# Altium PCB PCB2.PcbDoc
Units mm, origin at the board's own origin, x right, y up, seen from the top; angles counter-clockwise.
Board outline 170.05 x 133.6 mm, 2 copper layers (Top Layer, Bottom Layer); 22 components, 20 nets, 102 pads, 5 vias.
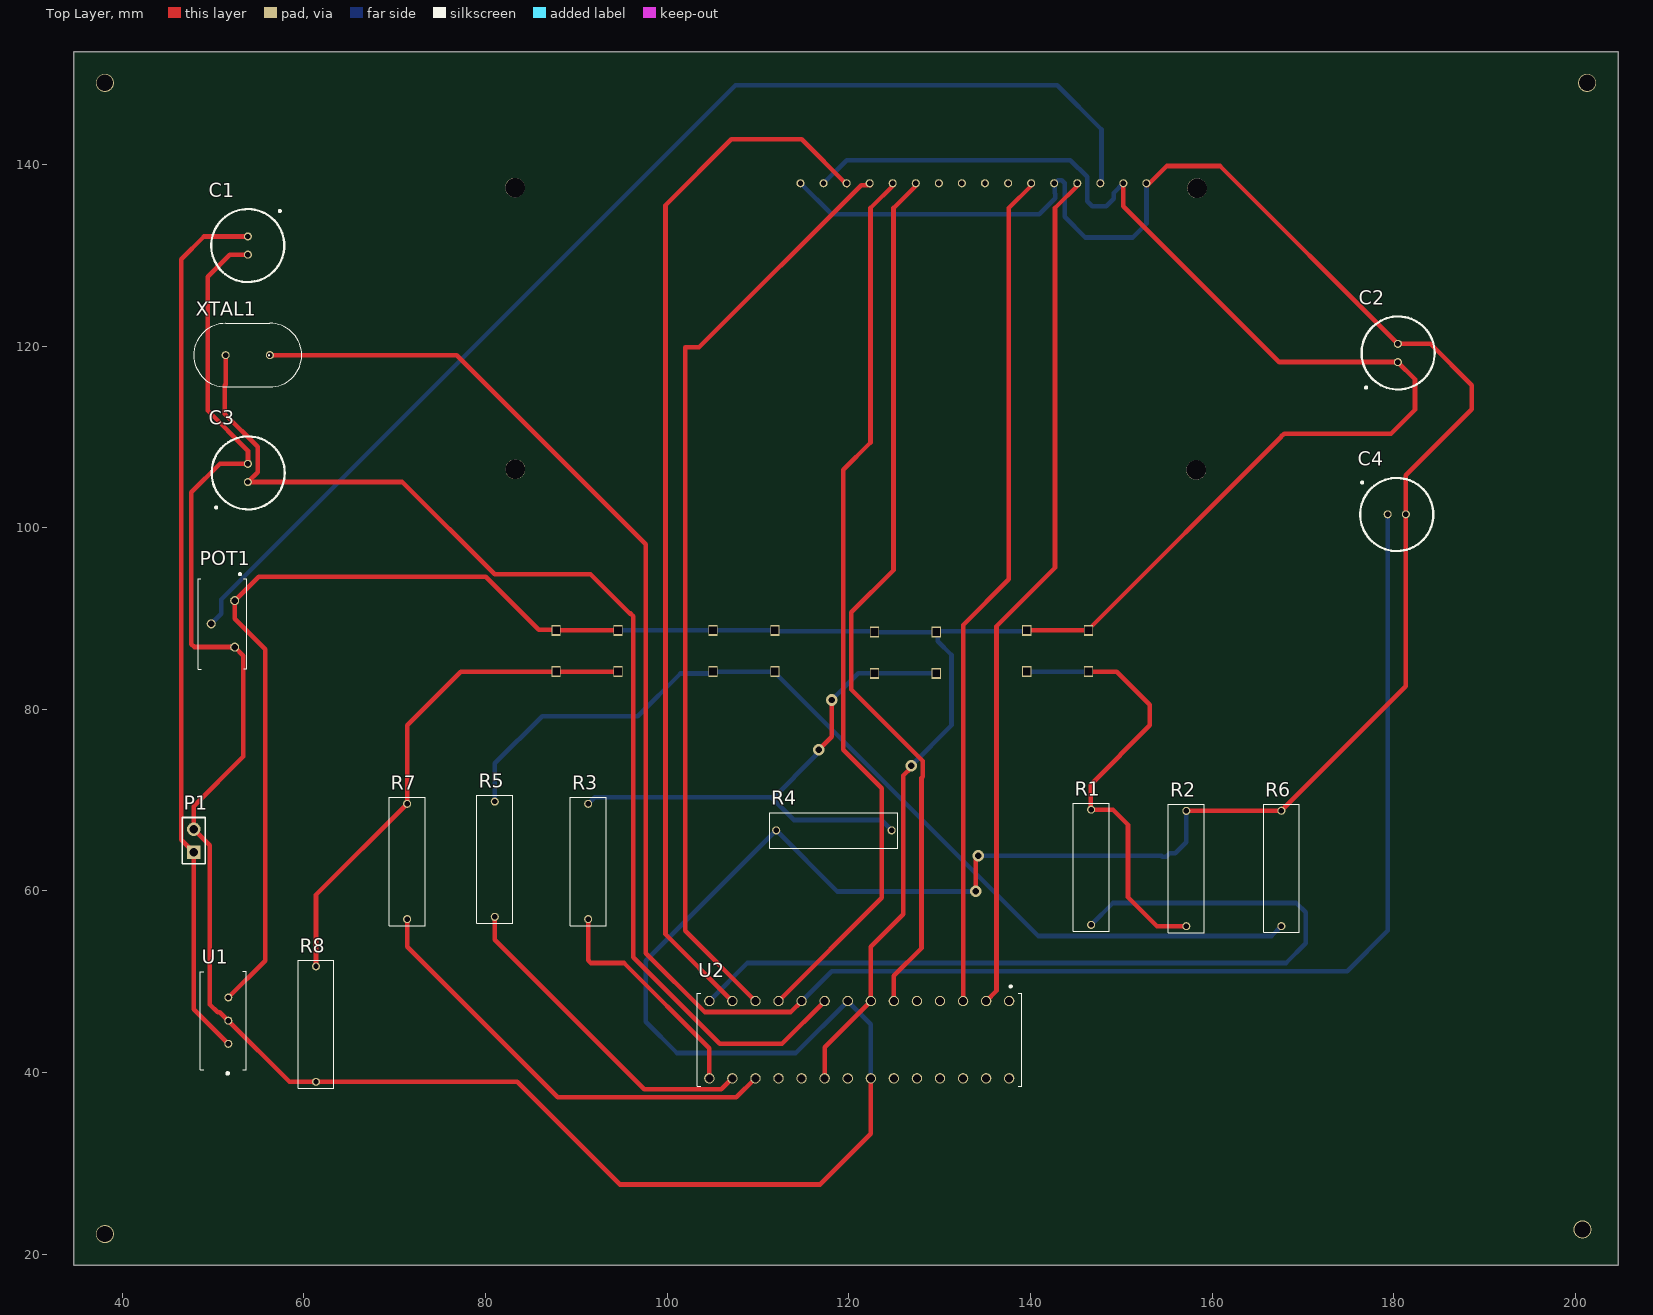
[diagram p0: Top Layer view]
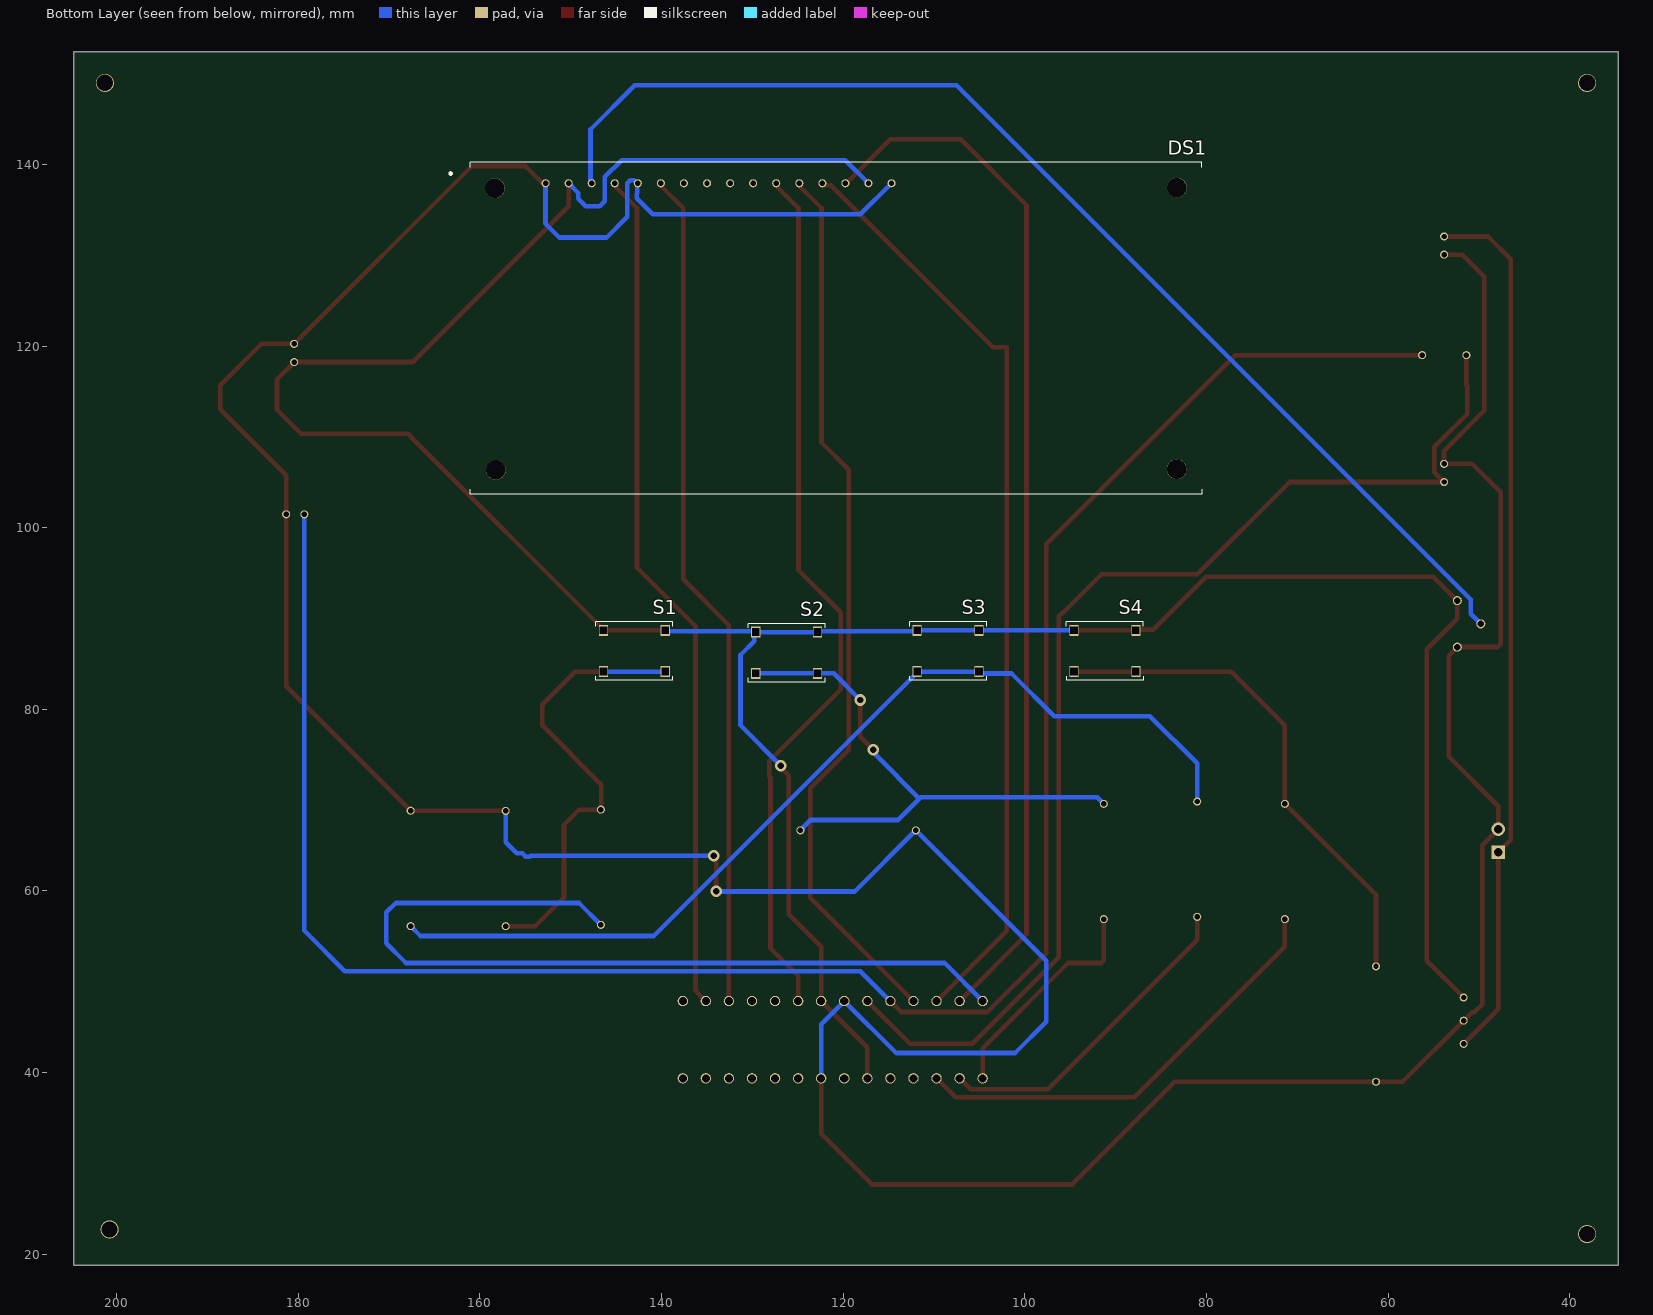
[diagram p1: Bottom Layer view, seen from below]
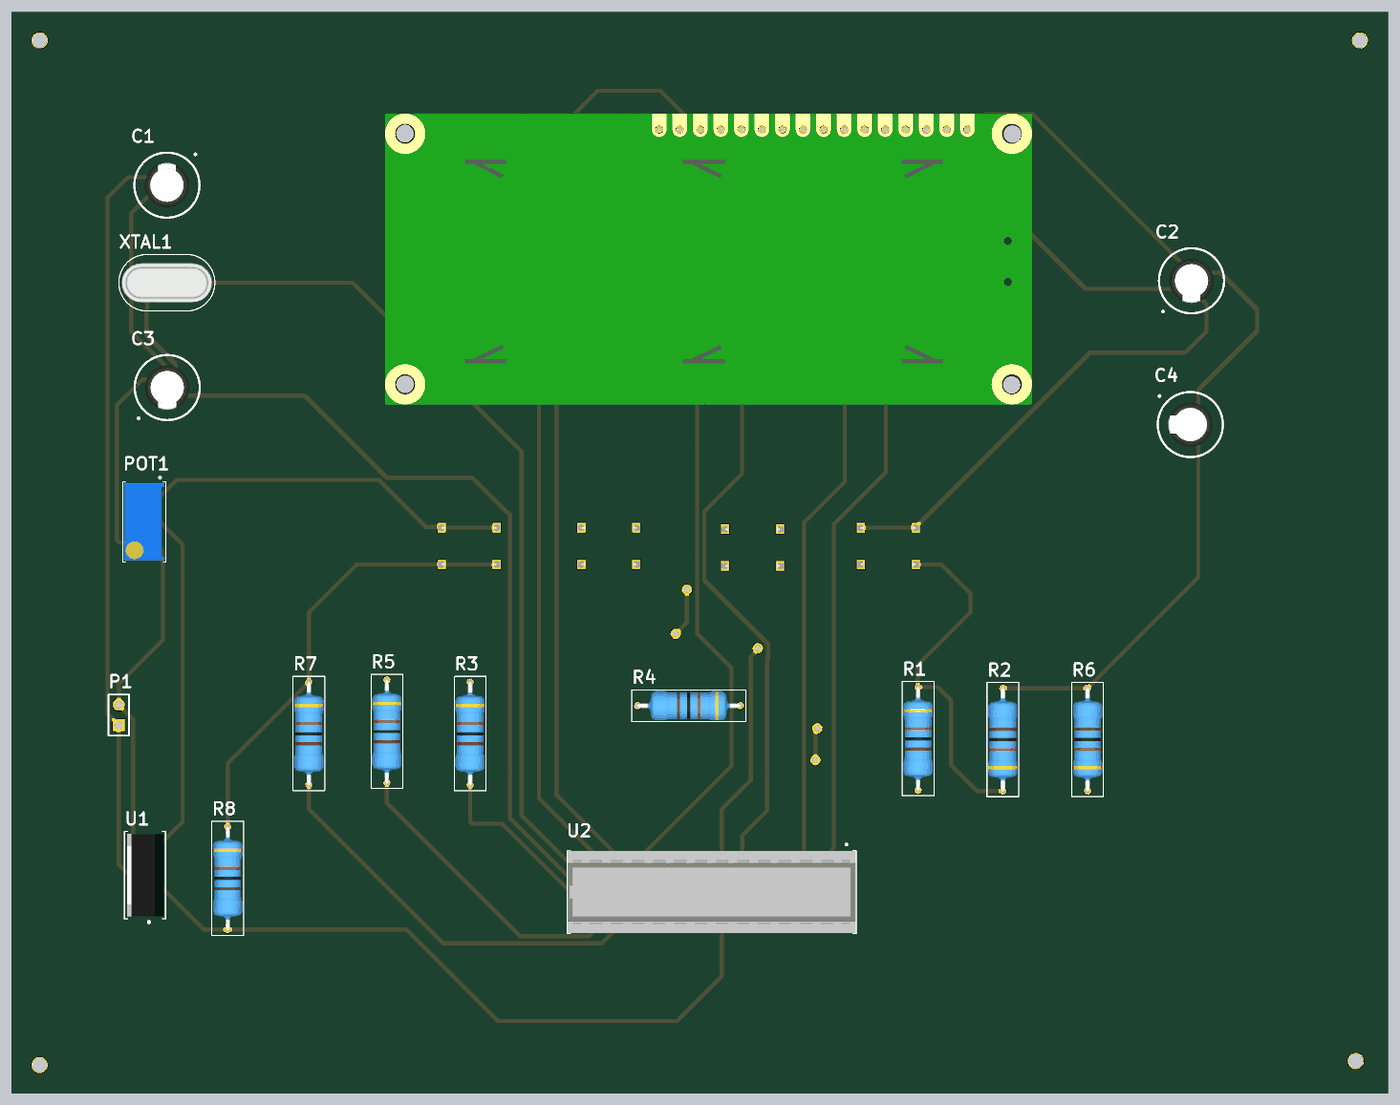
[diagram p2: 3D render of the assembled board from above, using the file's embedded part models]
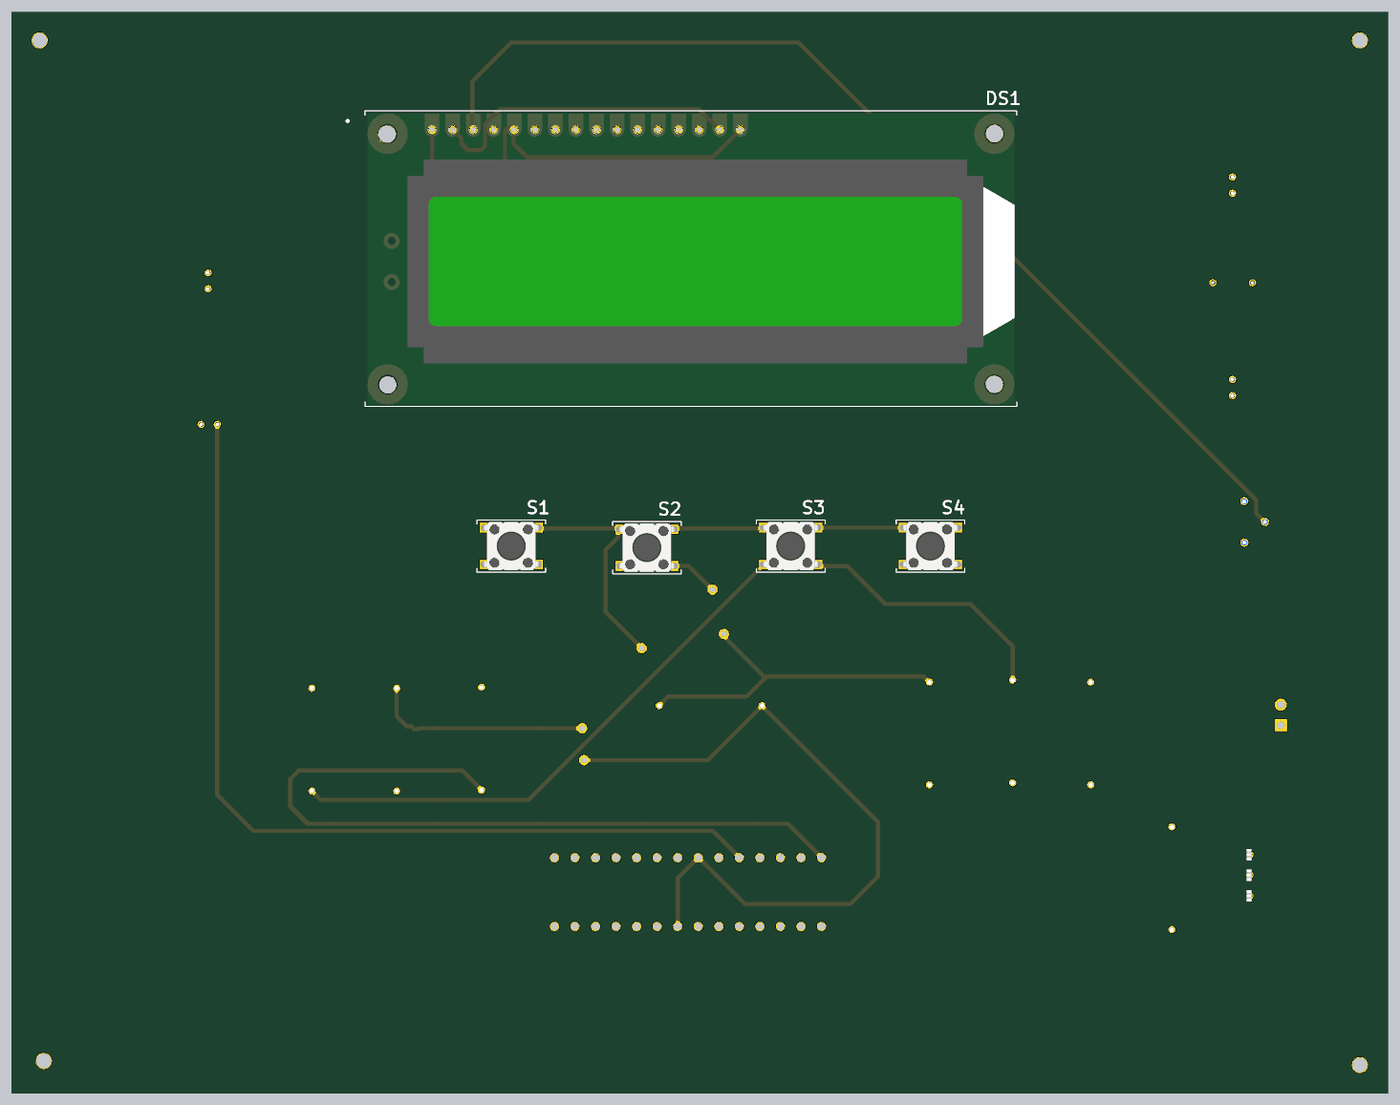
[diagram p3: 3D render of the assembled board from below, using the file's embedded part models]

## Layer stack, top to bottom
Top Solder: solder mask 0.0102, Solder Resist, Dk 3.5
Top Layer: signal copper 0.0356
Dielectric 1: dielectric 0.32, FR-4, Dk 4.8
Bottom Layer: signal copper 0.0356
Bottom Solder: solder mask 0.0102, Solder Resist, Dk 3.5

## Board outline
34.671,18.796 204.724,18.796 204.724,152.4 34.671,152.4

## Design rules (kind name [scope] priority, off if disabled: settings)
Clearance [All] p1: gap=0.381 ignorepadtopadclearanceinfootprint=TRUE
PolygonConnect [All] p1: connectstyle=Relief reliefconductorwidth=0.254 reliefentries=4 polygonreliefangle="90 Angle" airgapwidth=0.254
RoutingVias [All] p1: holewidth=0.711 width=1.27 viastyle="Through Hole" minholewidth=0.711 minwidth=1.27 maxholewidth=0.711 maxwidth=1.27
SilkToSolderMaskClearance [IsPad] p1: minsilkscreentomaskgap=0.051 clearancetoexposedcopper=TRUE
SolderMaskExpansion [All] p1: expansion=0.102 istentingtop=FALSE
Width [All] p1: maxlimit=0.635 minlimit=0.381 preferedwidth=0.508
29 further rules are at their usual default settings.

## Components (designator, comment, footprint, x,y, rotation, side; value= is the part's Value field where it differs from the comment)
C1 "Capacitor" UMP1HR22MDD1TP 53.848,131.064 r270 top locked value=0.22uF
C2 "Capacitor" UMP1HR22MDD1TP 180.467,119.237 r90 top locked value=0.22uF
C3 "Capacitor" UMP1HR22MDD1TP 53.848,106.029 r90 top locked value=0.22uF
C4 "Capacitor" UMP1HR22MDD1TP 180.34,101.473 r0 top locked value=0.22uF
DS1 "LM016L" "LCD DISPLAY" 123.352,123.249 r180 bottom locked
P1 "Header 2" HDR1X2 47.879,64.262 r90 top locked
POT1 "Variable Resistor" "10k Trimmer" 51.054,89.408 r270 top locked
R1 "Resistor" RESAD975W59L900D300 146.685,62.611 r270 top locked value=10K
R2 "Resistor" RESAD975W59L900D300 157.168,62.47 r90 top locked value=10K
R3 "Resistor" RESAD975W59L900D300 91.313,63.246 r270 top locked value=10K
R4 "Resistor" RESAD975W59L900D300 118.364,66.675 r180 top locked value=10K
R5 "Resistor" RESAD975W59L900D300 81.026,63.5 r270 top locked value=10K
R6 "Resistor" RESAD975W59L900D300 167.64,62.484 r90 top locked value=10K
R7 "Resistor" RESAD975W59L900D300 71.374,63.246 r270 top locked value=10K
R8 "Resistor" RESAD975W59L900D300 61.341,45.339 r270 top locked value=10K
S1 "Push Button - SPST" "PUSH BUTTON" 143.002,86.424 r180 bottom locked
S2 "Push Button - SPST" "PUSH BUTTON" 126.238,86.233 r180 bottom locked
S3 "Push Button - SPST" "PUSH BUTTON" 108.458,86.424 r180 bottom locked
S4 "Push Button - SPST" "PUSH BUTTON" 91.186,86.424 r180 bottom locked
U1 "7805 Voltage Regulator" TO255P1040X460X1968-3 51.689,45.72 r90 top locked value=5V
U2 "Atmega 328P U" DIP793W45P254L3479H457Q28 121.158,43.624 r270 top locked
XTAL1 "Crystal" ECS-160-20-4VX 53.823,118.996 r0 top locked

## Footprints (in the part's own frame and the unit in brackets; to place one, negate y for a bottom-side part, rotate by r counter-clockwise, add the part's x,y. Pads: shape width x height; smd on the part's side, far side on the other; paste and mask are expansions set on the pad)
"10k Trimmer" [mm]
  round 1 hole 0.7: 1(-2.56,1.33) 2(2.56,1.33) 3(0,-1.25)
  silkscreen extent -5.58,-2.67 4.98,2.66, body extent -4.76,-2.48 4.77,2.48, height 11.55
DIP793W45P254L3479H457Q28 [mil]
  round 45 hole 35: 1(-167.5,650) 2(-167.5,550) 3(-167.5,450) 4(-167.5,350) 5(-167.5,250) 6(-167.5,150) 7(-167.5,50) 8(-167.5,-50) 9(-167.5,-150) 10(-167.5,-250) 11(-167.5,-350) 12(-167.5,-450) 13(-167.5,-550) 14(-167.5,-650) 15(167.5,-650) 16(167.5,-550) 17(167.5,-450) 18(167.5,-350) 19(167.5,-250) 20(167.5,-150) 21(167.5,-50) 22(167.5,50) 23(167.5,150) 24(167.5,250) 25(167.5,350) 26(167.5,450) 27(167.5,550) 28(167.5,650)
  silkscreen extent -235,-703 202,704, body extent -201,-701 201,701, height 314
ECS-160-20-4VX [mil]
  round 35 hole 23.62: 1(-96.06,0) 2(95.97,0.13)
  silkscreen extent -234,-138 234,138, body extent -220,-96 220,95, height 157
HDR1X2 [mm] "Connector; Header; 2 Position"
  rect 1.5x1.5 hole 0.9: 1(0,0)
  round 1.5 hole 0.9: 2(2.54,0)
  silkscreen extent -1.27,-1.27 3.81,1.27
"LCD DISPLAY" [mil]
  round 35 hole 23.62: 1(-1158.62,577.66) 2(-1058.62,577.66) 3(-958.62,577.66) 4(-858.62,577.66) 5(-758.62,577.66) 6(-658.62,577.66) 7(-558.62,577.66) 8(-458.62,577.66) 9(-358.62,577.66) 10(-258.62,577.66) 11(-158.62,577.66) 12(-58.62,577.66) 13(41.38,577.66) 14(141.39,577.66) 15(241.39,577.66) 16(341.13,577.7)
  round 85.35 hole 85.04 unplated: 17(-1374.16,-664.84)
  round 85.35 hole 85.04: 18(1577.45,-662.19) 19(-1378.01,556.28) 20(1578.29,558.59)
  silkscreen extent -1575,-770 1687,669, body extent -1474,-761 1676,656, height 350
"PUSH BUTTON" [mm]
  rect 1x1.2 hole 0.8 square: 1(-3.4,2.27) 2(3.4,2.27) 3(-3.4,-2.27) 4(3.4,-2.27)
  silkscreen extent -4.24,-3.24 4.26,3.21, body extent -3.85,-3 3.85,3, height 4
RESAD975W59L900D300 [mil]
  round 35 hole 23.62: 1(-250,0) 2(250,0)
  silkscreen extent -278,-77 278,78, body extent -260,-71 262,71, height 146
TO255P1040X460X1968-3 [mil]
  round 35 hole 23.62: 1(-100.39,0) 2(0,0) 3(100.39,0)
  silkscreen extent -234,-78 213,122, body extent -201,-67 200,111, height 610
UMP1HR22MDD1TP [mil]
  round 35 hole 23.62: 1(-39.36,0) 2(39.37,0)
  silkscreen extent -158,-159 158,157, body extent -108,-109 108,107, height 492

## Part data
C1 C2 C3 C4: "Generic Capacitor", Voltage=25V, Polarity=Polarized
DS1: "16x2 LCD display with character size 5x8"
P1: "Header, 2-Pin", LatestRevisionDate=17-Jul-2002, LatestRevisionNote="Re-released for DXP Platform.", Publisher="Altium Limited"
POT1: "Variable resistor"
R1 R2 R3 R4 R5 R6 R7 R8: "Generic Resistor", Tolerance=5%
S1 S2 S3 S4: "Microswitch - SPST"
U1: "Linear 5V voltage regulator."
U2: "AVR series Microcontroller IC 8-Bit 20MHz 32KB (16K x 16) FLASH 28-PDIP", IC type="AtMega 328p - 28spdip"
XTAL1: "Crystal Oscillator", Frequency=16MHz

## Free pads (board coordinates)
  round 2 hole 1.8: 4(38.1,22.225) 4(38.1,148.971) 4(200.787,22.733) 4(201.295,148.971)

## Via types
v1: diameter 1.27, hole 0.711, Top Layer to Bottom Layer, 5 vias

## Nets (pads, with @x,y where several pads share a name; then routed paths per layer and width w, separated by ;. In a path a pad name is that pad's centre, name@x,y a point inside that pad or via, vN(x,y) a via of type N, cw(c..) or ccw(c..) an arc to the next point about the centre after c; other vN are vias at no path point)
+5V0: C2.1 DS1.2 DS1.15 POT1.1 S1.1 S1.2 S2.1 S2.2 S3.1 S3.2 S4.1 S4.2 U1.3 U2.7 U2.20 | length 331.3
  Top Layer w0.508: U1.3 55.753,52.334 55.753,86.614 52.384,89.983 POT1.1 55.031,94.615 80.01,94.615 85.852,88.773 87.707,88.773 S4.2 S4.1 ; U2.20 117.348,42.799 U2.7 122.428,53.848 126.009,57.429 126.009,72.717 126.873,73.581 v1(126.873,73.787) ; S1.2 S1.1 146.402,88.794 167.64,110.032 167.64,110.065 167.938,110.363 179.705,110.363 182.348,113.006 182.348,116.356 C2.1 167.386,118.237 150.241,135.382 DS1.2
  Bottom Layer w0.508: S4.1 S3.2 S3.1 111.954,88.599 122.742,88.599 S2.2 S2.1 ; DS1.15 119.761,140.462 144.399,140.462 146.24,138.621 146.24,135.954 146.812,135.382 148.336,135.382 149.167,136.213 149.167,136.848 DS1.2 ; v1(126.873,73.787) 131.318,78.232 131.318,85.979 129.797,87.5 129.797,88.344 S2.1 ; S1.2 139.506,88.599 129.734,88.599 S2.1 ; S1.1 S1.1@146.431,88.723
+7V4: C1.1 P1.1 U1.1 | length 96.9
  Top Layer w0.508: U1.1 47.879,46.98 P1.1 46.494,65.647 46.494,129.552 49.006,132.064 C1.1
D4: DS1.11 U2.6 | length 97.6
  Top Layer w0.508: U2.6 124.968,50.673 128.016,53.721 128.016,72.463 128.143,72.59 128.143,74.313 120.269,82.187 120.269,90.678 124.933,95.342 124.933,135.196 DS1.11@127.473,137.736
  Bottom Layer w0.508: U2.6 U2.6@124.968,48.051
D5: DS1.12 U2.11 | length 98.6
  Top Layer w0.508: U2.11 123.634,59.245 123.634,71.31 119.38,75.565 119.38,106.369 122.393,109.382 122.393,135.196 DS1.12@124.933,137.736
D6: DS1.13 U2.12 | length 103
  Top Layer w0.508: U2.12 101.981,55.626 101.981,119.864 103.508,119.864 121.367,137.723 122.38,137.723 DS1.13@122.393,137.736
D7: DS1.14 U2.13 | length 115.8
  Top Layer w0.508: U2.13 99.822,55.245 99.822,135.509 107.061,142.748 114.84,142.748 DS1.14@119.853,137.736
EN: DS1.6 U2.3 | length 93
  Top Layer w0.508: U2.3 132.588,89.281 137.633,94.326 137.633,135.196 DS1.6@140.173,137.736
GND: C1.2 C2.2 C3.2 C4.2 DS1.1 DS1.5 DS1.16 P1.2 POT1.2 R2.2 R4.2 R6.2 R8.2 U1.2 U2.8 U2.22 | length 472.3
  Top Layer w0.508: C1.2 51.832,130.064 49.403,127.635 49.403,112.903 53.848,108.458 C3.2 50.768,107.029 47.625,103.886 47.625,87.166 47.923,86.868 52.364,86.868 53.34,85.892 53.34,74.803 47.879,69.342 P1.2 49.657,65.024 49.657,47.498 50.51,46.645 50.764,46.645 U1.2 58.42,38.989 R8.2 83.491,38.989 94.794,27.686 116.84,27.686 122.428,33.274 U2.22 ; v1(133.985,59.944) 133.985,63.5 134.239,63.754 v1(134.239,63.881) ; DS1.1@152.939,137.736 155.03,139.827 160.877,139.827 C2.2 184.055,120.237 188.595,115.697 188.595,113.03 181.34,105.775 C4.2 181.34,82.534 R6.2 167.633,68.827 157.175,68.827 R2.2
  Bottom Layer w0.508: DS1.16 118.117,134.493 140.97,134.493 142.748,136.271 142.748,136.779 142.694,136.833 142.694,137.849 DS1.5 142.724,137.922 143.046,138.244 143.466,138.244 143.764,137.946 143.764,134.239 146.05,131.953 151.257,131.953 152.781,133.477 DS1.1 ; U2.22 122.428,45.339 U2.8 114.173,42.164 101.092,42.164 97.663,45.593 97.663,52.324 R4.2 118.745,59.944 v1(133.985,59.944) ; v1(134.239,63.881) 154.432,63.881 154.539,63.774 154.96,63.774 155.321,64.135 155.956,64.135 157.168,65.347 R2.2
NetR1_1: R1.1 R2.1 S1.3 S1.4 | length 49.8
  Top Layer w0.508: S1.3 149.526,84.154 153.162,80.518 153.162,78.232 146.641,71.711 146.641,69.005 R1.1 149.098,68.961 150.749,67.31 150.749,59.309 153.938,56.12 R2.1
  Bottom Layer w0.508: S1.4 S1.3
NetR3_1: R3.1 R4.1 S2.3 S2.4 | length 61.5
  Top Layer w0.508: v1(116.713,75.565) 118.11,76.962 v1(118.11,81.026)
  Bottom Layer w0.508: R3.1 92.03,70.313 111.461,70.313 113.954,67.82 123.569,67.82 R4.1 ; 111.617,70.158 116.389,74.93 116.389,75.034 116.713,75.359 v1(116.713,75.565) ; v1(118.11,81.026) 121.047,83.963 S2.4 S2.3
NetR5_1: R5.1 R6.1 S3.3 S3.4 | length 107.6
  Top Layer w0.508: S3.4@105.011,84.201 S3.4
  Bottom Layer w0.508: R5.1 81.026,74.041 86.233,79.248 96.774,79.248 101.473,83.947 104.851,83.947 S3.4 S3.3 111.858,84.054 140.872,55.04 146.379,55.04 166.546,55.04 R6.1
NetR7_1: R7.1 R8.1 S4.3 S4.4 | length 56.4
  Top Layer w0.508: R8.1 61.341,59.563 R7.1 71.374,78.232 77.296,84.154 S4.4 S4.3
PotV: DS1.3 POT1.3 | length 131.6
  Bottom Layer w0.508: POT1.3 50.906,90.51 50.906,92.095 107.528,148.717 142.958,148.717 147.828,143.847 DS1.3@147.828,137.745
RS: DS1.4 U2.2 | length 94.1
  Top Layer w0.508: U2.2 136.271,49.022 136.271,89.154 142.713,95.596 142.713,135.196 DS1.4@145.253,137.736
S0: R1.2 U2.14 | length 96.8
  Bottom Layer w0.508: U2.14 108.839,52.07 168.148,52.07 170.307,54.229 170.307,57.658 169.291,58.674 149.098,58.674 R1.2
S1: R3.2 U2.15 | length 25.2
  Top Layer w0.508: R3.2 91.313,52.368 91.611,52.07 95.25,52.07 104.648,42.672 U2.15
S2: R5.2 U2.16 | length 36
  Top Layer w0.508: R5.2 81.026,54.61 97.472,38.163 105.981,38.163 U2.16
S3: R7.2 U2.17 | length 49.1
  Top Layer w0.508: R7.2 71.374,53.848 87.947,37.274 107.632,37.274 U2.17
XTAL1: C3.1 U2.9 XTAL1.1 | length 129
  Top Layer w0.508: XTAL1.1 51.383,115.745 51.308,115.67 51.308,112.522 54.927,108.902 54.927,106.108 C3.1 70.853,105.029 81.013,94.869 91.567,94.869 95.885,90.551 95.968,90.551 96.266,90.253 96.266,52.705 105.791,43.18 112.649,43.18 U2.9
XTAL2: C4.1 U2.10 XTAL1.2 | length 229
  Top Layer w0.508: XTAL1.2 76.835,118.999 97.663,98.171 97.663,53.158 104.148,46.672 113.602,46.672 U2.10
  Bottom Layer w0.508: U2.10 118.11,51.181 174.879,51.181 179.34,55.642 C4.1
pads on no net: DS1.7 DS1.8 DS1.9 DS1.10 DS1.17 DS1.18 DS1.19 DS1.20 U2.1 U2.4 U2.5 U2.18 U2.19 U2.21 U2.23 U2.24 U2.25 U2.26 U2.27 U2.28

## Silkscreen, mask and mechanical layers (free items; w line width, h text height)
Outline:
  lines w0.125: 34.804,152.4 34.679,152.4 ; 204.724,152.4 204.724,18.796 34.671,18.796 34.671,152.408 ; 34.671,152.408 34.679,152.4 ; 34.671,152.408 34.679,152.4
  lines w0.127: 34.804,152.4 204.724,152.4